# Altium PCB CBL003.PcbDoc
Units mil, origin at the board's own origin, x right, y up, seen from the top; angles counter-clockwise.
Board outline 779 x 1247 mil, 2 copper layers (Top Layer, Bottom Layer); 41 components, 17 nets, 113 pads, 32 vias.
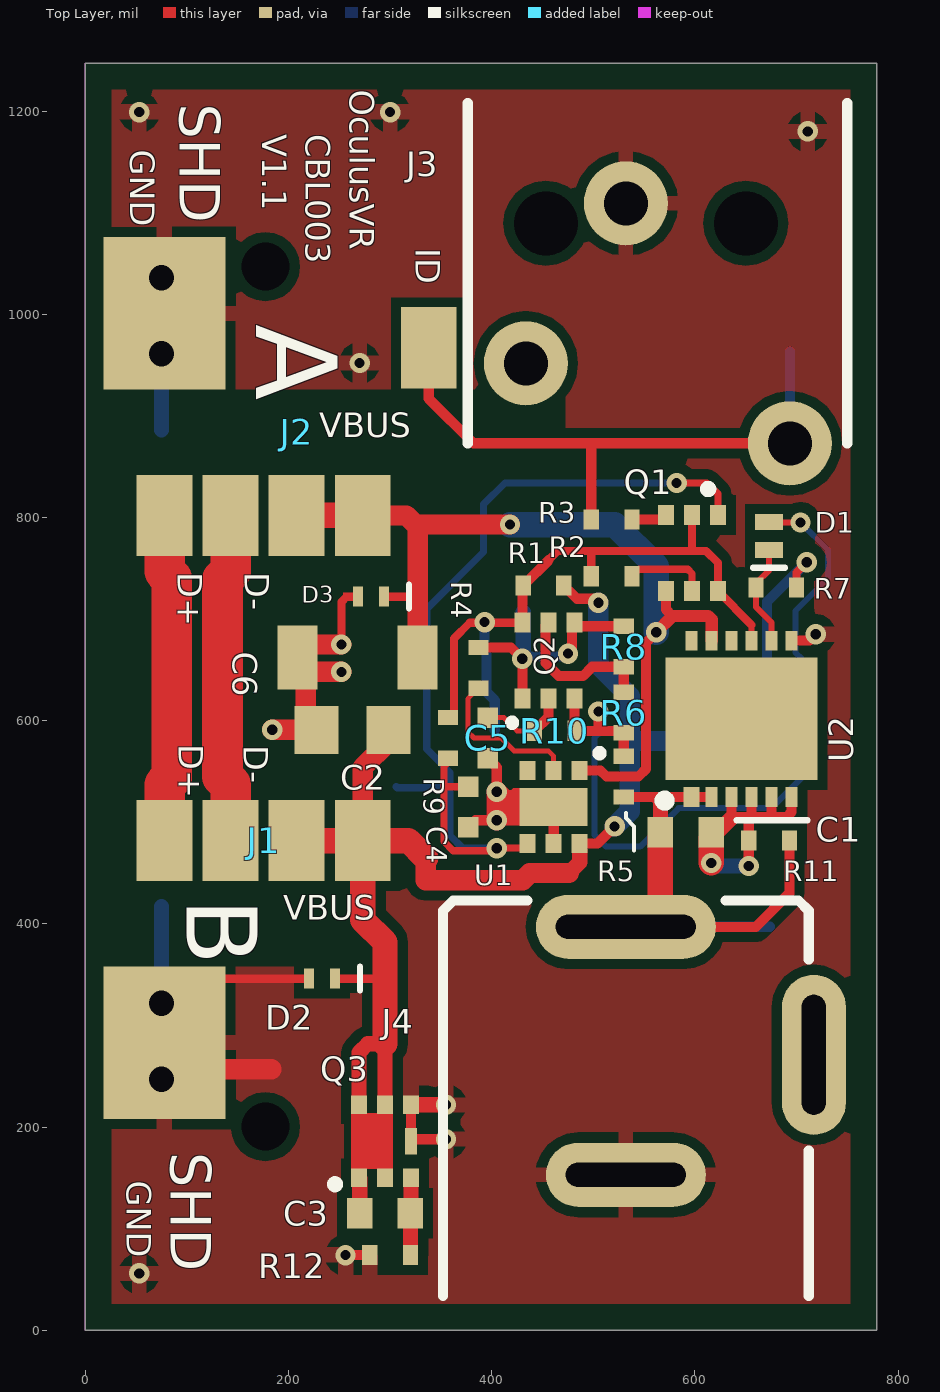
[diagram p0: Top Layer view]
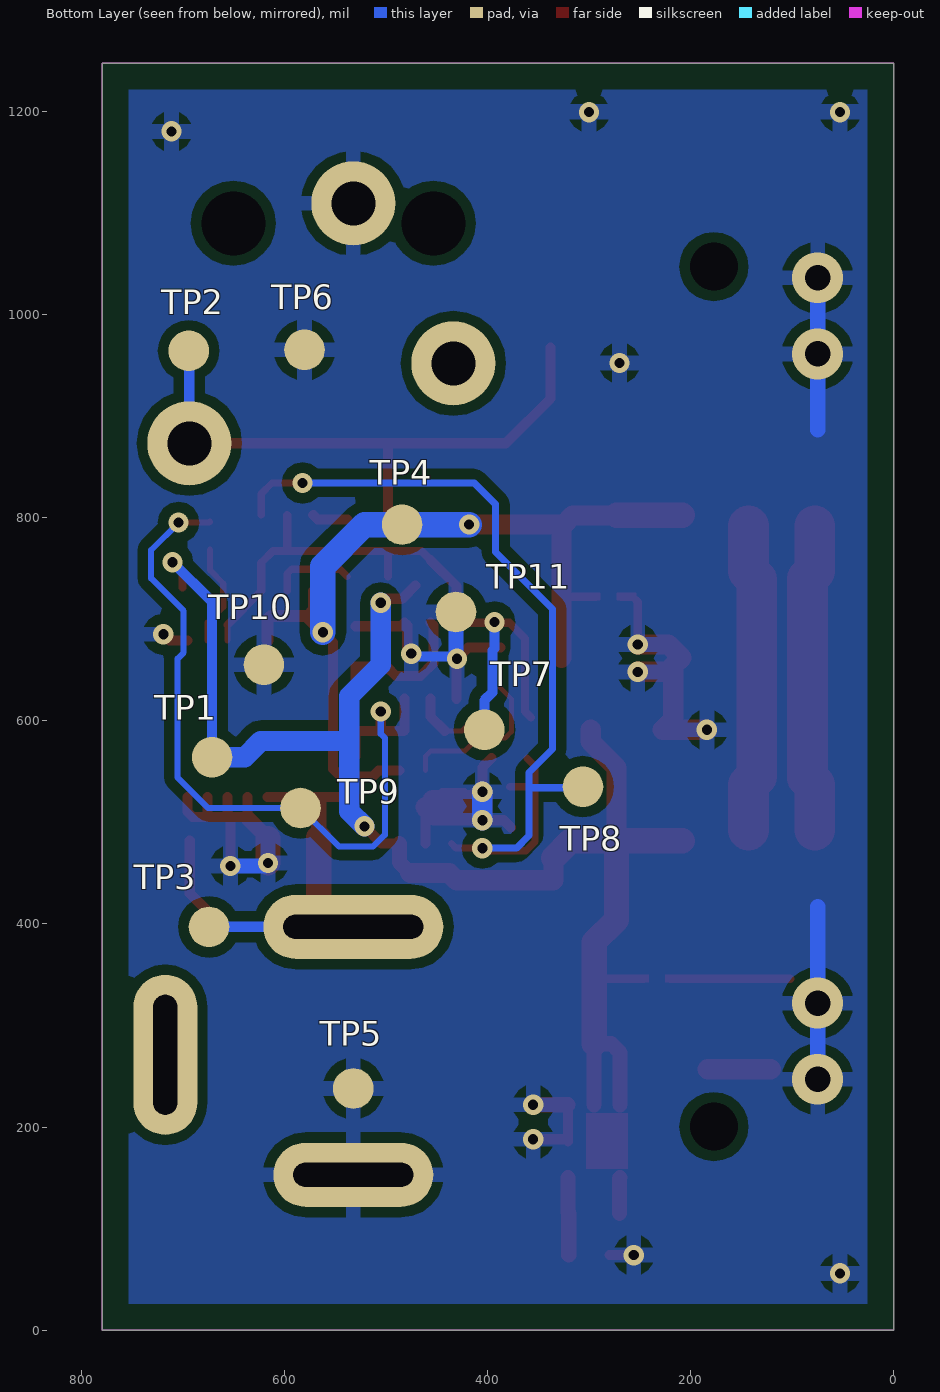
[diagram p1: Bottom Layer view, seen from below]
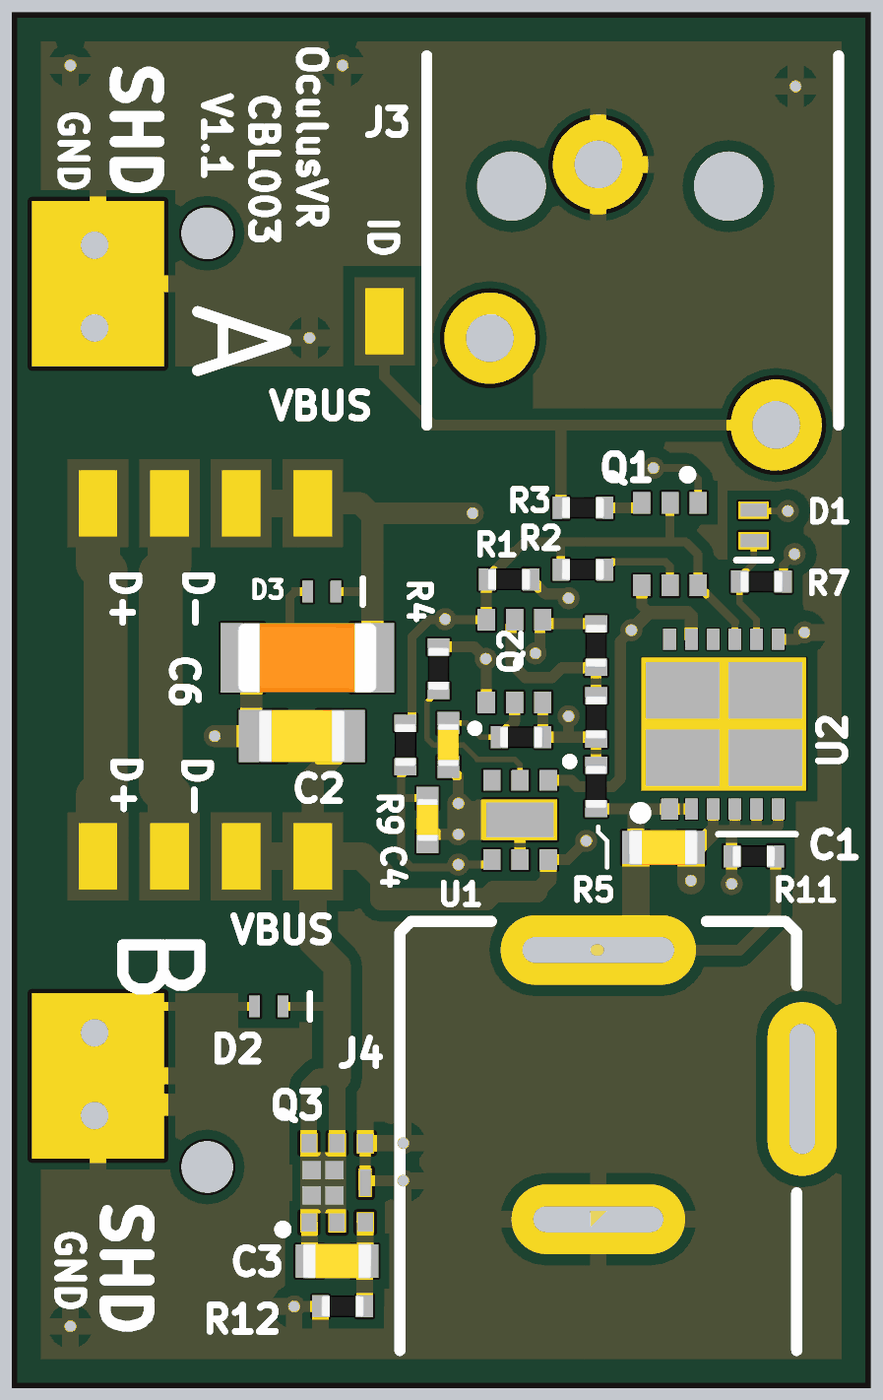
[diagram p2: 3D render of the assembled board from above, using the file's embedded part models]

## Layer stack, top to bottom
Top Layer: signal copper 1.4
Dielectric: core 12.6, FR-4, Dk 4.8
Bottom Layer: signal copper 1.4

## Board outline
0,0 779,0 779,1247 0,1247

## Design rules (kind name [scope] priority, off if disabled: settings)
AssemblyTestPointUsage [All] p1: valid=2
AssemblyTestpoint [All] p1: testpointundercomponent=TRUE minsize=30 maxsize=100 preferedsize=60 minholesize=0 maxholesize=40 preferedholesize=32 testpointgrid=1 usegrid=TRUE gridtolerance=0.01 allowsidetop=TRUE allowsidebottom=TRUE minspacing=100
Clearance Fiducial [HasFootprint('FIDUCIAL')] p1: gap=40
Clearance PolyToBoardOutline [InPolygon vs (OnLayer('Keep-Out Layer'))] p2: gap=25
Clearance PolyToPoly [InPolygon vs InPolygon] p3: gap=8
Clearance PolyToVia [InPolygon vs IsVia] p4: gap=10
Clearance PolyToTrace [InPolygon vs IsTrack] p5: gap=10
Clearance PolyToPad [InPolygon vs IsPad] p6: gap=10
Clearance PadToPad [IsPad vs IsPad] p7: gap=5
Clearance PadToVia [IsPad vs IsVia] p8: gap=4
Clearance [All] p9: gap=7
ComponentClearance [All] p1: gap=15 collisioncheckmode=3 verticalgap=10 showdistances=FALSE
FabricationTestPointUsage [All] p1: valid=2 allowmultiple=FALSE
FabricationTestpoint [All] p1: side=3 testpointundercomponent=TRUE minsize=30 maxsize=100 preferedsize=60 minholesize=0 maxholesize=40 preferedholesize=32 testpointgrid=1 allowsidetop=TRUE allowsidebottom=TRUE usegrid=TRUE gridtolerance=0.01
HoleSize [All] p1: absolutevalues=TRUE maxlimit=250 minlimit=10 maxpercent=80.000 minpercent=20.000
MinimumAnnularRing [All] p1: minimumring=5
MinimumSolderMaskSliver [All] p1: minsoldermaskwidth=4
PlaneClearance [All] p1: clearance=13
PlaneConnect [All] p1: planeconnectstyle=Direct reliefexpansion=10 reliefentries=4 reliefconductorwidth=10 reliefairgap=10
PolygonConnect [All] p1: connectstyle=Relief reliefconductorwidth=15 reliefentries=4 polygonreliefangle="90 Angle" airgapwidth=10
RoutingVias [All] p1: holewidth=10 width=32 viastyle="Through Hole" minholewidth=10 minwidth=20 maxholewidth=250 maxwidth=250
SilkToSilkClearance [All] p1: silktosilkclearance=0
SilkToSolderMaskClearance [IsPad] p1: minsilkscreentomaskgap=5 clearancetoexposedcopper=TRUE
SolderMaskExpansion [All] p1: expansion=4
Width [All] p1: maxlimit=50 minlimit=5 preferedwidth=10
17 further rules are at their usual default settings.

## Components (designator, comment, footprint, x,y, rotation, side; value= is the part's Value field where it differs from the comment)
C1 ".designator" CAP_CERAMIC_0603 591,490 r0 top
C2 ".designator" CAP_CERAMIC_0805 263,591 r180 top
C3 ".designator" CAP_CERAMIC_0603 295,115.07 r0 top
C4 ".designator" CAP_CERAMIC_0402 377,515 r270 top
C5 ".designator" CAP_CERAMIC_0402 396,583 r270 top
C6 ".designator" CAP_CERAMIC_1206 268,662 r180 top
D1 ".designator" SOD882 673,782 r270 top
D2 ".designator" LLP1006-2L 233,346 r180 top
D3 ".designator" LLP1006-2L 281,722 r180 top
J1 ".designator" USB_WIRE_MOUNT#1 138,492 r270 top
J2 ".designator" USB_WIRE_MOUNT#2 138,792 r270 top
J3 ".designator" CUI_SJ2509N 532,1247 r180 top
J4 ".designator" KLDX-0202 532,153 r90 top
Q1 ".designator" SOT363 597,765 r270 top
Q2 ".designator" SOT363 456,659 r90 top
Q3 ".designator" DFN2020-6 295,186.07 r0 top
R1 ".designator" RESISTOR_0402 451,733 r0 top
R2 ".designator" RESISTOR_0402 518,742 r0 top
R3 ".designator" RESISTOR_0402 518,798 r0 top
R4 ".designator" RESISTOR_0402 387,652 r270 top
R5 ".designator" RESISTOR_0402 530,545 r90 top
R6 ".designator" RESISTOR_0402 530,608 r270 top
R7 ".designator" RESISTOR_0402 680,731 r180 top
R8 ".designator" RESISTOR_0402 530,673 r270 top
R9 ".designator" RESISTOR_0402 357,583 r90 top
R10 ".designator" RESISTOR_0402 462,590 r180 top
R11 ".designator" RESISTOR_0402 673,482 r180 top
R12 ".designator" RESISTOR_0402 300,74.07 r0 top
TP1 ".designator" TESTPOINT40 671,564 r90 bottom
TP2 ".designator" TESTPOINT40 694,964 r90 bottom
TP3 ".designator" TESTPOINT40 674,397 r90 bottom
TP4 ".designator" TESTPOINT40 484,793 r90 bottom
TP5 ".designator" TESTPOINT40 532,238 r90 bottom
TP6 ".designator" TESTPOINT40 580,965 r90 bottom
TP7 ".designator" TESTPOINT40 403,591 r90 bottom
TP8 ".designator" TESTPOINT40 306,535 r90 bottom
TP9 ".designator" TESTPOINT40 584,514 r90 bottom
TP10 ".designator" TESTPOINT40 620,655 r0 bottom
TP11 ".designator" TESTPOINT40 431,707 r0 bottom
U1 ".designator" DFN200X200X050-6 461,515 r270 top
U2 ".designator" LLGA12-NCP374 646,602 r90 top

## Footprints (in the part's own frame and the unit in brackets; to place one, negate y for a bottom-side part, rotate by r counter-clockwise, add the part's x,y. Pads: shape width x height; smd on the part's side, far side on the other; paste and mask are expansions set on the pad)
CAP_CERAMIC_0402 [mil]
  rect 20x20 smd mask+2: 1(-20,0) 2(20,0)
  body extent -20,-10 20,10, height 22
CAP_CERAMIC_0603 [mil]
  rect 25x30 smd mask+2: 1(-25,0) 2(25,0)
  body extent -31,-16 31,16, height 22
CAP_CERAMIC_0805 [mm]
  rect 1.1x1.2 smd mask+0.051: 1(-0.9,0) 2(0.9,0)
  body extent -1,-0.6 1,0.6, height 0.7
CAP_CERAMIC_1206 [mm]
  rect 1x1.6 smd mask+0.051: 1(-1.5,0) 2(1.5,0)
  body extent -1.6,-0.8 1.6,0.8, height 0.98
CUI_SJ2509N [mm]
  round 0 hole 1.6 unplated paste+0 mask+0.102: 0(-3,4) 0(2,4)
  round 2.1 hole 1.1 paste+0 mask+0.102: 1(0,3.5) 2(2.5,7.5) 3(-4.1,9.5)
  silkscreen extent -5.54,1 3.95,9.5, body extent -5,-3 3.4,10, height 5
DFN200X200X050-6 [mm]
  rect 0.47x0.4 smd paste+0 mask+0.051: 1(-0.915,0.65) 2(-0.915,0) 3(-0.915,-0.65) 4(0.915,-0.65) 5(0.915,0) 6(0.915,0.65)
  rect 0.95x1.7 smd paste-0.076 mask+0.051: 7(0,0)
  silkscreen extent -1.4,1.09 -1.3,1.19, body extent -1,-1 1,1, height 0.5
DFN2020-6 [mm]
  rect 0.4x0.47 smd paste-0.025 mask+0.071: 1(-0.65,-0.913) 2(0,-0.913) 3(0.65,-0.913) 4(0.65,0.913) 5(0,0.913) 6(-0.65,0.913)
  rect 0.3x0.66 smd paste-0.025 mask+0.071: 7(0.65,0)
  Top Layer region: -0.85,-0.7 0.2,-0.7 0.2,0.7 -0.85,0.7
  silkscreen extent -1.35,-1.17 -1.15,-0.98, body extent -1,-1 1,1, height 0.8
KLDX-0202 [mm]
  oval 1.6x4.5 hole 0.6 slot 3.5 at 90 deg mask+0: 1(6.2,0)
  oval 1.6x4 hole 0.6 slot 3 at 90 deg mask+0: 2(0,0)
  oval 4x1.6 hole 0.6 slot 3 at 0 deg mask+0: 3(3,-4.7)
  silkscreen extent -3.02,-4.57 6.86,4.57, body extent -7.7,-4.5 6.8,4.5, height 10.8
LLGA12-NCP374 [mm]
  rect 0.49x0.4 smd paste+0 mask+0.025: 1(-1.96,1.25)
  rect 0.49x0.3 smd paste+0 mask+0.025: 2(-1.96,0.75) 3(-1.96,0.25) 4(-1.96,-0.25) 5(-1.96,-0.75) 6(-1.96,-1.25) 7(1.95,-1.25) 8(1.95,-0.75) 9(1.95,-0.25) 10(1.95,0.25) 11(1.95,0.75) 12(1.95,1.25)
  rect 3.06x3.8 smd paste-3 mask+0.025: 13(0,0)
  silkscreen extent -2.17,1.8 -1.93,2.05, body extent -2,-2 2,2, height 0.6
LLP1006-2L [mm]
  rect 0.25x0.5 smd paste+0 mask+0.05: 1(-0.325,0) 2(0.325,0)
  Top Layer region: 0.2,-0.1 0.7,-0.1 0.7,0.1 0.2,0.1
  Top Layer region: -0.7,-0.1 -0.2,-0.1 -0.2,0.1 -0.7,0.1
  silkscreen extent -0.95,-0.3 -0.95,0.3, body extent -0.5,-0.3 0.5,0.3, height 0.5
RESISTOR_0402 [mil]
  rect 15x20 smd mask+2: 1(-20,0) 2(20,0)
  body extent -20,-10 20,10, height 15
SOD882 [mm]
  rect 0.4x0.7 smd paste-0.05 mask+0.05: 1(-0.35,0) 2(0.35,0)
  silkscreen extent 0.8,-0.4 0.8,0.4, body extent -0.65,-0.45 0.65,0.45, height 0.5
SOT363 [mm]
  rect 0.5x0.4 smd paste+0 mask+0.051: 1(-0.95,0.65) 2(-0.95,0) 3(-0.95,-0.65) 4(0.95,-0.65) 5(0.95,0) 6(0.95,0.65)
  silkscreen extent -1.68,0.33 -1.52,0.48, body extent -1.1,-1.1 1.1,1.1, height 0.9
TESTPOINT40 [mil]
  round 40 smd paste-20 mask+4: 1(0,0)
USB_WIRE_MOUNT#1 [mil]
  rect 80x55 smd paste-30 mask-10: 1(10,135) 2(10,5) 3(10,-60)
  body extent -29,-117 29,117
USB_WIRE_MOUNT#2 [mil]
  rect 80x55 smd paste-30 mask-10: 1(-10,70) 2(-10,5) 3(-10,-60) 4(-175,200)
  body extent -29,-117 29,117

## Part data
C1: library part CAP-NONPOL, "='CAP, ' + Material + ', ' + Value + ', ' + Tolerance + ', '  + Voltage + ', ' + Package"
C2: library part 120-000023, "CAP, CERAMIC, 22UF, ±20%, 6.3V, X5R, 0805"
C3: library part 120-000031, "CAP, CERAMIC, 1000PF, ±10%, 50V, C0G, 0603"
C4 C5: library part 120-000010, "CAP, CERAMIC, 1uF, ±10%, 10V, X5R, 0402"
C6: library part 120-000030, "CAP, CERAMIC, 100UF, ±20%, 6.3V, X5R, 1206"
D1: library part 150-000003, "DIODE, SCHOTTKY, 40V, SOD882"
D2 D3: library part VCUT07B1-HD1, "DIODE, ESD SUPPRESSOR, SINGLE LINE BI-DIRECTIONAL, LLP1006-2L"
J1 J2: library part USB_WIRE_MOUNT
J3: library part AUDIO_JACK_3P, "CONN, 2.5MM AUDIO JACK"
J4: library part DC_JACK, "CONN, DC POWER JACK"
Q1: library part PNP_DUAL, "='TRANSISTOR, DUAL PNP, ' + Package"
Q2: library part NPN_DUAL, "='TRANSISTOR, DUAL NPN, ' + Package"
Q3: library part 170-000003, "TRANS, NMOS, DFN2020-6"
R1 R2 R3 R4 R5 R6 R7 R8 R9 R10 R11 R12: library part RESISTOR, "='RES, ' + Package + ', ' + Value + ', ' + Tolerance + ', '  + Power"
TP1 TP2 TP3 TP4 TP5 TP6 TP7 TP8 TP9 TP10 TP11: library part TESTPOINT
U1: library part NCP380, "IC, LOAD SWITCH, UDFN6"
U2: library part 300-000021, "IC, LOAD SWITCH WITH OVP/RVP, LLGA-12"

## Free pads (board coordinates)
  rect 120x150 smd paste-100 mask+3.94: 0(78,283) 0(78,1001)
  round 0 hole 47.24 unplated mask+25.59: 0(177.17,200.39) 0(177.17,1046.85)
  rect 55x80 smd paste-30 mask-10: 0(208,482) 0(273,802)

## Via types
v1: diameter 20, hole 10, Top Layer to Bottom Layer, 28 vias
v2: diameter 50, hole 25, Top Layer to Bottom Layer, 4 vias

## Nets (pads, with @x,y where several pads share a name; then routed paths per layer and width w, separated by ;. In a path a pad name is that pad's centre, name@x,y a point inside that pad or via, vN(x,y) a via of type N, cw(c..) or ccw(c..) an arc to the next point about the centre after c; other vN are vias at no path point)
AUXVCC: C1.1 J4.1 R5.1 R11.1 TP3.1 U2.1 U2.2 | length 618.9
  Top Layer w10: J4.1@530,397.09 J4.1 532.09,397 660,397 693,430 R11.1 ; R5.1 565.83,525 565.83,521 ; 566,524.83 U2.1 U2.2
  Top Layer w15: 565.83,521 566,520.83 C1.1@566,485
  Top Layer w25: J4.1 566,397.09 C1.1@566,485
  Bottom Layer w10: J4.1 TP3.1@673.91,397.09
AUXVCCCLAMP: D1.1 Q2.3 R5.2 R6.2 R10.1 TP9.1 | length 791.8
  Top Layer w6: D1.1 673.78,795 v1(704,795)
  Top Layer w10: Q2.3 481.59,590.41 R10.1 505,590 ; v1(505,609) 505,590 ; R5.2 R6.2 528,590 505,590
  Bottom Layer w6: v1(505,609) 505,587 501,583 501,487.72 512.72,476 546,476 TP9.1 675,514 705,544 705,661 699,667 699,708 731,740 731,768 v1(704,795)
DIR_N: Q1.2 Q1.6 Q2.6 R1.1 R2.1 R9.2 TP7.1 U2.9 | length 662.6
  Top Layer w6: U2.9 655.84,694.35
  Top Layer w8: R9.2 363,609 363,681.06 378.35,696.4 Q2.6 ; 456,758 465,767 498,767 ; R2.1 498,767 ; Q1.2 597,767 ; 655.84,694.35 Q1.6 622.59,755.41 611,767 597,767 ; 498,767 597,767
  Top Layer w10: Q2.6 430.41,732.41 R1.1 456,758
  Bottom Layer w10: v1(393,697) 393,671 395,669 395,628 403,620 TP7.1
EN_N: D1.2 R7.2 U2.8 | length 101.3
  Top Layer w6: D1.2 673,748 660,735 R7.2 660,712.06 675.53,696.53 U2.8
ENVBUS: C4.1 Q1.1 R9.1 TP8.1 U1.4 | length 927.3
  Top Layer w7: 353,535 C4.1 C4.1@378,535 ; R9.1@361,563 353,555 353,481 362,472 402.5,472 v1(405,474.5) 430.93,474.5 U1.4 ; v1(582,834) 612,834 622.59,823.41 Q1.1
  Bottom Layer w7: TP8.1 307,534 359,534 ; v1(405,474.5) 371.5,474.5 359,487 359,534 ; v1(582,834) 413,834 392,813 392,766 336,710 336,572 359,549 359,534
GND: C1.2 C2.2 C4.2 C5.2 C6.2 D2.2 D3.2 J3.1 J4.2 pad.0@78,283 pad.0@78,1001 Q2.1 Q2.4 Q3.4 Q3.7 R4.1 R8.1 R11.2 R12.1 TP5.1 TP6.1 TP10.1 TP11.1 U1.5 U1.7 U2.3 U2.4 U2.5 U2.6 U2.7 | length 1781.7
  Top Layer w5: 422,531 445,531 U1.7
  Top Layer w8: pad.0@102,346 D2.2 ; v1(252,675) 252,717 257,722 D3.2
  Top Layer w10: v1(256,74) 256.07,74.07 R12.1 ; Q3.4 Q3.7 322.52,188 v1(355,188) ; C4.2 384,502 v1(405,502) ; R4.1 419,672 v1(430,661) 430.41,660.59 Q2.1 ; C5.2 405,554 v1(405,530) ; U1.5 U1.7 ; v1(475,666) 479,670 479,693.81 Q2.4 484.99,693 R8.1 ; C1.2@616,484 C1.2@617,485 ; 636.16,504.16 U2.3 ; 636.16,505.16 652.16,505.16 ; v1(653,457) R11.2 653,504.32 652.16,505.16 ; U2.4 655.84,508.84 652.16,505.16 ; U2.5 675.53,508.53 672.16,505.16 ; U2.6 695.21,510.21 690.16,505.16 672.16,505.16 ; U2.7 712.77,678.77 v1(719,685) ; 652.16,505.16 672.16,505.16
  Top Layer w15: pad.0@77,322 pad.0@78,322 ; Q3.4 v1(355,222) ; C1.2@617,485 636.16,504.16
  Top Layer w20: pad.0@121,257 183,257 ; v1(184,591) C2.2 217,601.57 C6.2@217,653.94 ; v1(252,648) 222.94,648 C6.2@217,653.94 ; v1(252,675) 221.94,675 C6.2 C6.2@217,653.94 ; U1.7@444,515 U1.7 453,507 410,507 v1(405,502) v1(405,530) 413,522 U1.7@454,522
  Top Layer w25: v1(616,460) C1.2@616,484
  Bottom Layer w10: v1(430,661) 431,662 432,663 472,663 v1(475,666)
  Bottom Layer w15: v2@75,267 v2(75,322) 75,397 75,417 ; 75,886 v2(75,961) v2(75,1036) ; v1@431,662 TP11.1 ; v1(616,460) 619,457 v1(653,457)
  Bottom Layer w20: v1(405,502) v1(405,530)
  other v1: 53,56 270,952 711,1180 53,1199 300,1199
  other v2: 75,247
NetC3_2: C3.2 Q3.3 R12.2 | length 76.3
  Top Layer w15: R12.2 C3.2 320.59,115.67 Q3.3
NetC5_1: C5.1 Q2.2 R10.2 | length 88.8
  Top Layer w5: C5.1 412,603 425,590 R10.2
  Top Layer w10: R10.2 456,604 Q2.2
NetJ1_2: J1.2 J2.2 | length 306.6
  Top Layer w40: J1.2@143,492 143,537 135,545 135,739 143,747 J2.2@143,792
NetJ1_3: J1.3 J2.3 | length 305.8
  Top Layer w40: J1.3@78,492 78,537 85,544 85,740 78,747 J2.3@78,792
NetQ1_3: Q1.3 R3.2 | length 35.2
  Top Layer w10: R3.2 567.01,798 Q1.3
NetQ1_5: Q1.5 R2.2 | length 81
  Top Layer w7: R2.2 545,749 593,749 597,745 Q1.5
NetQ2_5: Q2.5 R6.1 R8.2 | length 151.8
  Top Layer w10: Q2.5 453,693.4 453,656.89 465.89,644 490,644 499,653 R8.2 R6.1
NetR4_2: R4.2 U1.2 | length 156
  Top Layer w5: R4.2 376.5,621.5 376.5,589.07 382.56,583 409.44,583 422,570.43 422,570 456,570 461,565 U1.2
SYNC: J2.4 J3.3 R3.1 TP2.1 | length 589.1
  Top Layer w10: J2.4 338,917 382.02,872.98 498,872.98 ; R3.1 498,872.98 ; J3.3 498,872.98
  Bottom Layer w10: J3.3 TP2.1@693.42,963.42
VBUS_IN: C2.1 C3.1 D2.1 J1.1 pad.0@208,482 Q3.1 Q3.2 Q3.5 Q3.6 R1.2 R7.1 TP1.1 U1.6 | length 1587.5
  Top Layer w8: D2.1 295,346 ; R7.1 700,746 v1(710,756)
  Top Layer w10: R1.2 484,720 501,720 v1(505,716) ; U1.6 503.98,478.98 v1(521,496)
  Top Layer w15: Q3.1 270,149.54 C3.1 ; Q3.6 269.41,273.41 278,282 295,282 Q3.5 ; 476,450 486.59,460.59 U1.6
  Top Layer w20: J1.1 273,554 298.43,579.43 C2.1 ; 335,465 335,443 430.5,443 437.5,450 476,450
  Top Layer w25: pad.0@208,482 J1.1 ; 295,282 295,382 273,404 J1.1 ; 335,465 318,482 J1.1
  Bottom Layer w10: TP1.1 671,717 v1(710,756)
  Bottom Layer w20: v1(505,716) 505,655 536,624 536,580 ; v1(521,496) 536,511 536,580 ; TP1.1 639,564 623,580 536,580
VBUS_OUT: C6.1 D3.1 J2.1 pad.0@273,802 Q1.4 TP4.1 U1.1 U2.11 | length 922.2
  Top Layer w8: D3.1 327.06,722
  Top Layer w10: U1.1 506.98,551.02 513,545 544.47,545 552,552.53 552,677 v1(562,687) ; Q1.4 571.41,709.59 578,703
  Top Layer w12: v1(562,687) 578,703 613,703 616.47,699.53 U2.11
  Top Layer w20: pad.0@273,802 316,802 325,793 v1(418,793) ; C6.1 327.06,722 327.06,790.94
  Top Layer w25: J2.1 pad.0@273,802
  Bottom Layer w25: v1(418,793) TP4.1 521,793 562,752 v1(562,687)
pads on no net: J3.0 J3.2 J4.3 U1.3 U2.10 U2.12 U2.13

## Polygon pours and split planes (outlines as drawn)
GND on Bottom Layer "Bottom Layer-GND" (solid, remove dead copper, pour order 4): 0,0 779,0 779,1247 0,1247
GND on Top Layer "Top Layer-GND" (solid, remove dead copper, pour order 3): 0,0 779,0 779,1249 0,1249

## Keep-outs
Keep-Out Layer:
  the board outline again, w1

## Other copper
Top Layer:
  pour cut-out: 0,827 278,827 278,358 0,358
  pour cut-out: 0,926 473,926 473,743 0,743
  pour cut-out: 123,542 343,542 343,442 123,442
  pour cut-out: 587,536 703,536 703,514 587,514
  pour cut-out: 589,690.5 703,690.5 703,667.5 589,667.5
  pour cut-out: 206,360 229,360 229,331 206,331

## Silkscreen, mask and mechanical layers (free items; w line width, h text height)
Top Overlay:
  lines w3.94: 532,509 532,504 540,496 540,472
  lines w6: 641,502 711,502
  text "OculusVR" at 260.39,1221 h24 r270
  text "SHD" at 93,1207 h40 r270
  text "V1.1" at 174,1177 h24 r270
  text "CBL003" at 217,1177 h24 r270
  text "A" at 168,990 h80 r270
  text "B" at 100,425 h70 r270
  text "SHD" at 84,175 h40 r270
Top Solder:
  the board outline again, w10
Bottom Solder:
  the board outline again, w10
Mechanical 1:
  the board outline again, w1
Mechanical 15:
  lines w5: 412.69,634.31 412.69,615.7 431.3,615.7 ; 623.7,808.3 640.31,808.3 640.31,791.69

## Text inside footprints (layer, text, board x,y; h text height)
J1: Top Overlay "VBUS" at 195,404 h24; Top Overlay "D-" at 156,576 h24 r270; Top Overlay "D+" at 92,577 h24 r270; Top Overlay "GND" at 41,147 h24 r270
J2: Top Overlay "VBUS" at 230,879 h24; Top Overlay "D-" at 157,746 h24 r270; Top Overlay "D+" at 91,746 h24 r270; Top Overlay "ID" at 325,1065 h24 r270; Top Overlay "GND" at 44,1162 h24 r270